# Altium PCB PCB1.PcbDoc
Units mm, origin at the board's own origin, x right, y up, seen from the top; angles counter-clockwise.
Board outline 170 x 50 mm, 4 copper layers (Top Layer, Internal Plane 1, Internal Plane 2, Bottom Layer), stack 0.462 mm thick; 3 components, 0 nets, 34 pads, 0 vias.
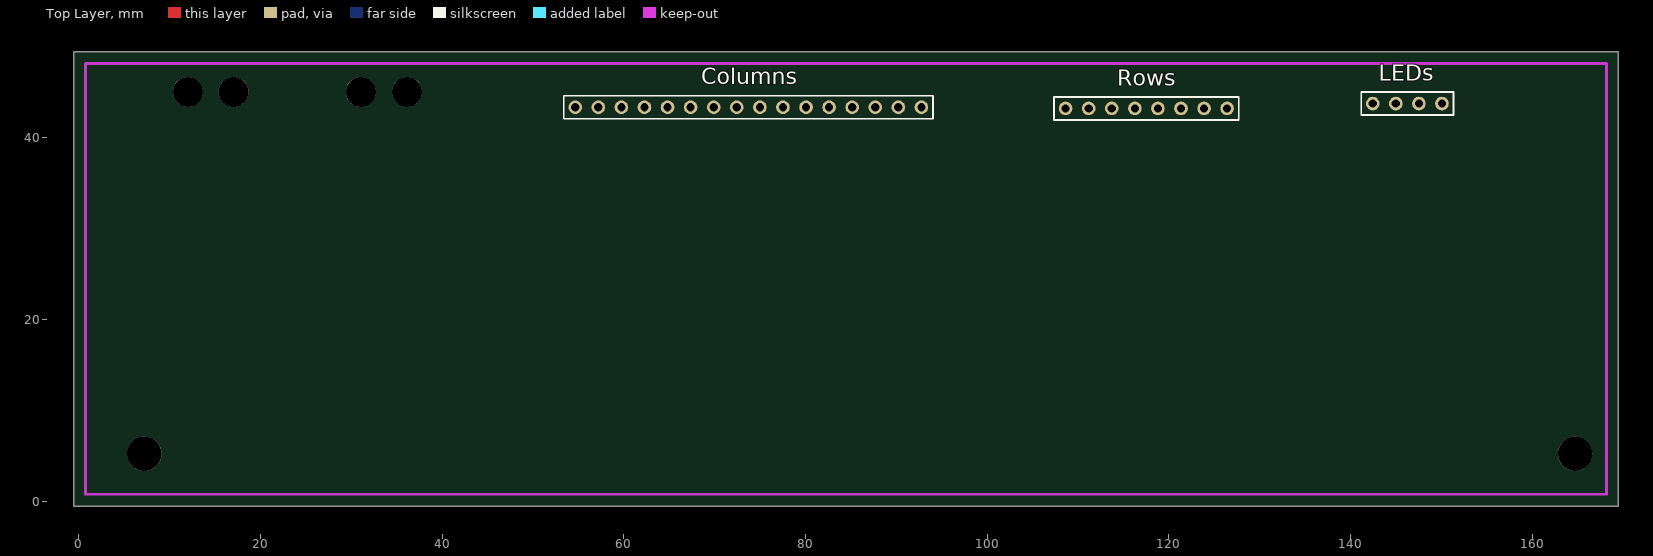
[diagram p0: Top Layer view]
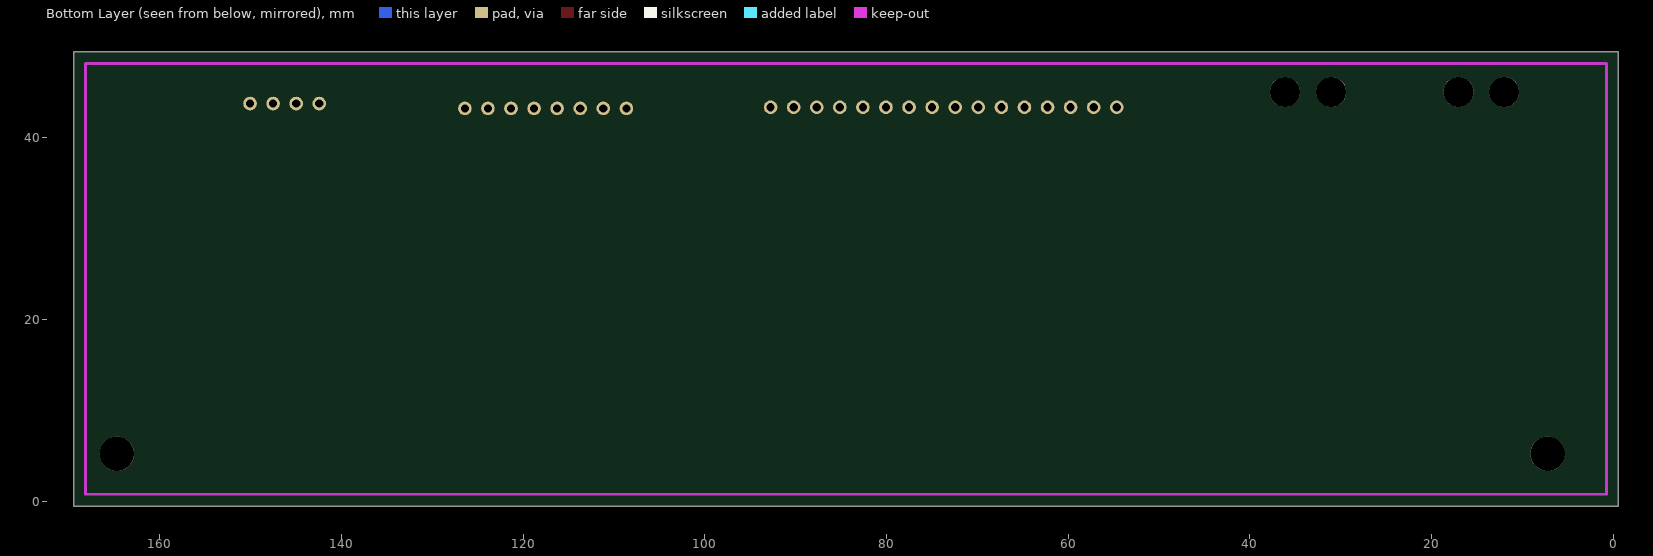
[diagram p1: Bottom Layer view, seen from below]
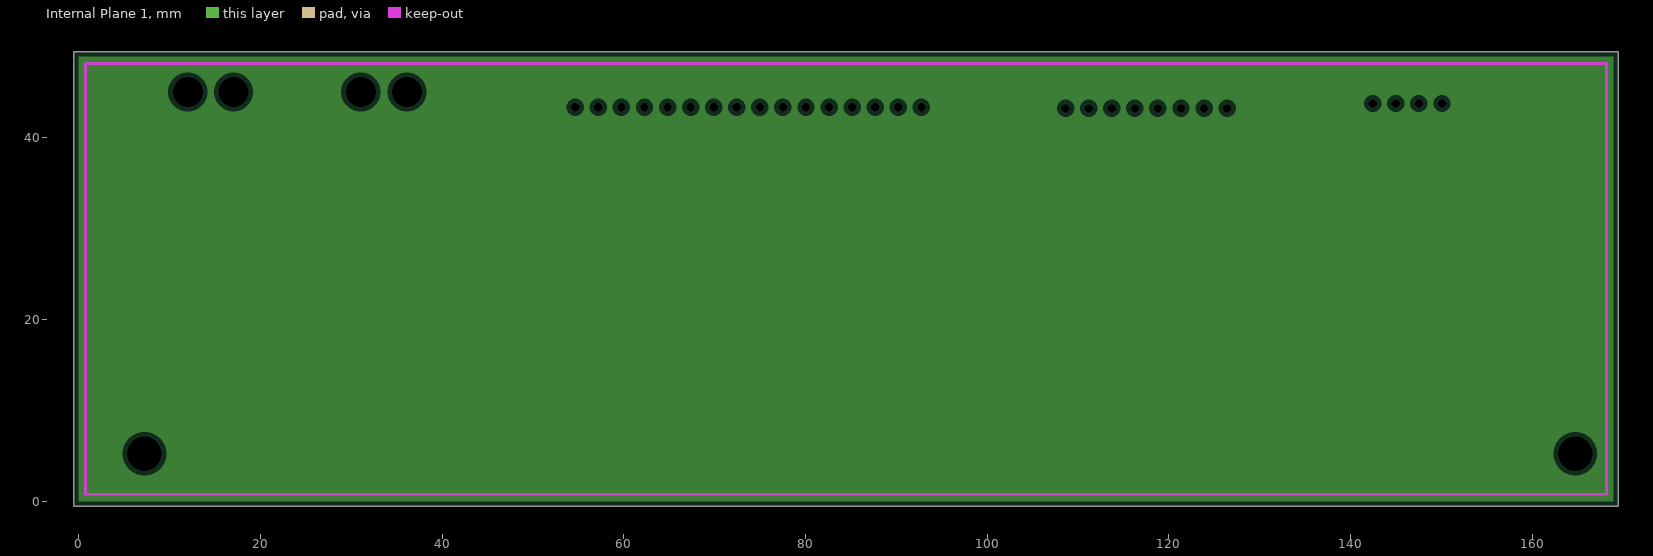
[diagram p2: Internal Plane 1, clearances drawn from the general rule]
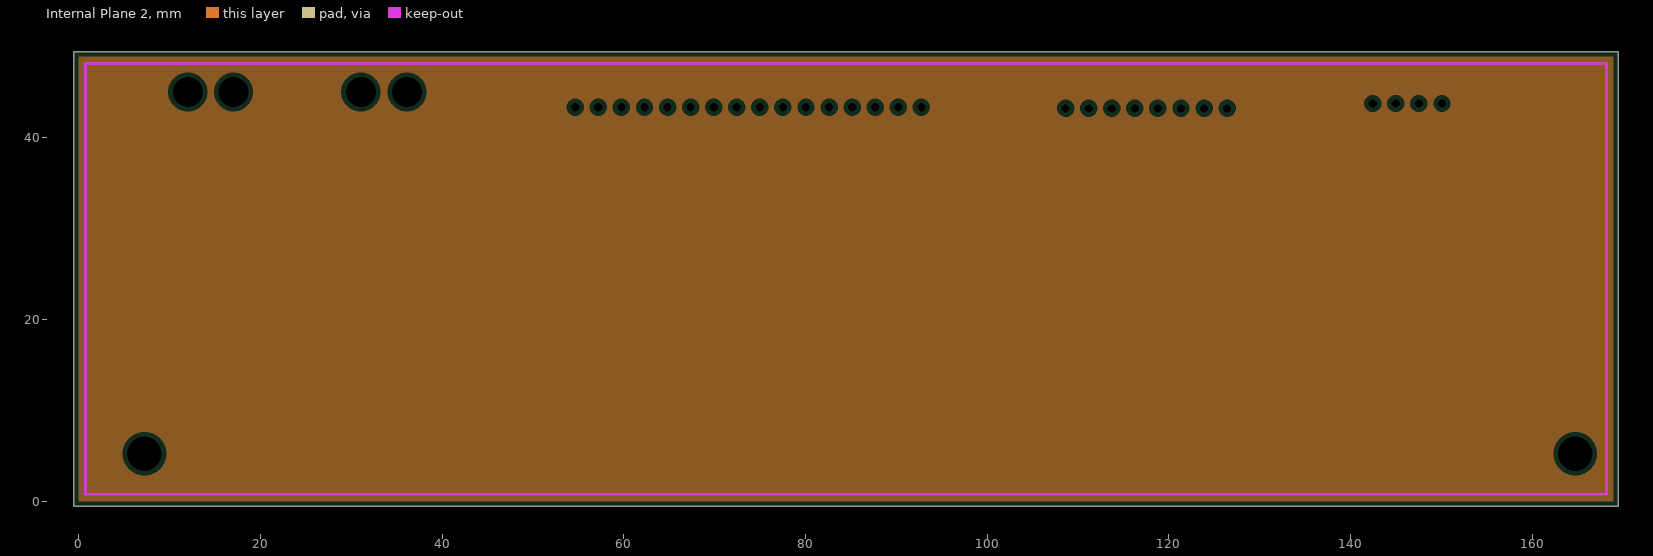
[diagram p3: Internal Plane 2, clearances drawn from the general rule]

## Layer stack, top to bottom
Top Solder: solder mask 0.0102, Solder Resist, Dk 3.5
Top Layer: signal copper 0.0356
Internal Plane 1: plane copper 0.0356
Internal Plane 2: plane copper 0.0356
Dielectric 1: dielectric 0.32, FR-4, Dk 4.8
Bottom Layer: signal copper 0.0356
Bottom Solder: solder mask 0.0102, Solder Resist, Dk 3.5

## Board outline
-0.538,-0.538 169.462,-0.538 169.462,49.462 -0.538,49.462

## Design rules (kind name [scope] priority, off if disabled: settings)
Clearance [All] p1: gap=0.2
PlaneClearance [All] p1: clearance=0.508
PlaneConnect [All] p1: planeconnectstyle=Relief reliefexpansion=0.508 reliefentries=4 reliefconductorwidth=0.254 reliefairgap=0.254
PolygonConnect [All] p1: connectstyle=Relief reliefconductorwidth=0.254 reliefentries=4 polygonreliefangle="90 Angle" airgapwidth=0.254
RoutingVias [All] p1: holewidth=0.6 width=1 viastyle="Through Hole" minholewidth=0.711 minwidth=1.27 maxholewidth=0.711 maxwidth=1.27
SolderMaskExpansion [All] p1: expansion=0.102
Width [All] p1: maxlimit=0.2 minlimit=0.2 preferedwidth=0.2
28 further rules are at their usual default settings.

## Components (designator, comment, footprint, x,y, rotation, side; value= is the part's Value field where it differs from the comment)
Columns "Comment" HDR1X16 54.661,43.358 r0 top
LEDs "Comment" HDR1X4 142.443,43.764 r0 top
Rows "Comment" HDR1X8 108.636,43.231 r0 top

## Footprints (in the part's own frame and the unit in brackets; to place one, negate y for a bottom-side part, rotate by r counter-clockwise, add the part's x,y. Pads: shape width x height; smd on the part's side, far side on the other; paste and mask are expansions set on the pad)
HDR1X4 [mm] "Connector; Header; 4 Position"
  round 1.5 hole 0.9: 1(0,0) 2(2.54,0) 3(5.08,0) 4(7.62,0)
  silkscreen extent -1.27,-1.27 8.89,1.27
HDR1X8 [mm] "Connector; Header; 8 Position"
  round 1.5 hole 0.9: 1(0,0) 2(2.54,0) 3(5.08,0) 4(7.62,0) 5(10.16,0) 6(12.7,0) 7(15.24,0) 8(17.78,0)
  silkscreen extent -1.27,-1.27 19.05,1.27
HDR1X16 [mm] "Connector; Header; 16 Position"
  round 1.5 hole 0.9: 1(0,0) 2(2.54,0) 3(5.08,0) 4(7.62,0) 5(10.16,0) 6(12.7,0) 7(15.24,0) 8(17.78,0) 9(20.32,0) 10(22.86,0) 11(25.4,0) 12(27.94,0) 13(30.48,0) 14(33.02,0) 15(35.56,0) 16(38.1,0)
  silkscreen extent -1.27,-1.27 39.37,1.27

## Part data
Columns: library part "Header 16"
LEDs: library part "Header 4"
Rows: library part "Header 8"

## Free pads (board coordinates)
  round 3.8 hole 3.8 unplated: 0(7.239,5.207) 0(164.719,5.207)
  round 3.302 hole 3.302 unplated: 2(12.011,45.05) 2(17.051,45.05) 2(31.051,45.05) 2(36.151,45.05)

## Nets (pads, with @x,y where several pads share a name; then routed paths per layer and width w, separated by ;. In a path a pad name is that pad's centre, name@x,y a point inside that pad or via, vN(x,y) a via of type N, cw(c..) or ccw(c..) an arc to the next point about the centre after c; other vN are vias at no path point)
pads on no net: Columns.1 Columns.2 Columns.3 Columns.4 Columns.5 Columns.6 Columns.7 Columns.8 Columns.9 Columns.10 Columns.11 Columns.12 Columns.13 Columns.14 Columns.15 Columns.16 LEDs.1 LEDs.2 LEDs.3 LEDs.4 Rows.1 Rows.2 Rows.3 Rows.4 Rows.5 Rows.6 Rows.7 Rows.8

## Keep-outs
Keep-Out Layer:
  lines w0.3: 0.762,0.762 0.762,48.162 168.162,48.162 168.162,0.762 0.762,0.762

## Silkscreen, mask and mechanical layers (free items; w line width, h text height)
Drill Drawing:
  text ".LEGEND" at 174.542,4.542 h1.52
  text "Drill Drawing." at 174.542,2.002 h1.52

## Dimensions
0.762,0.762 to 0.762,48.162 on Mechanical 1
0.762,0.762 to 168.162,0.762 on Mechanical 1